# Altium PCB IRISkontroller.PcbDoc
Units mm, origin at the board's own origin, x right, y up, seen from the top; angles counter-clockwise.
Board outline 85 x 85 mm, 2 copper layers (Top Layer, Bottom Layer); 73 components, 52 nets, 271 pads, 6 vias.
Unrouted connection lines stored in the file: 181.
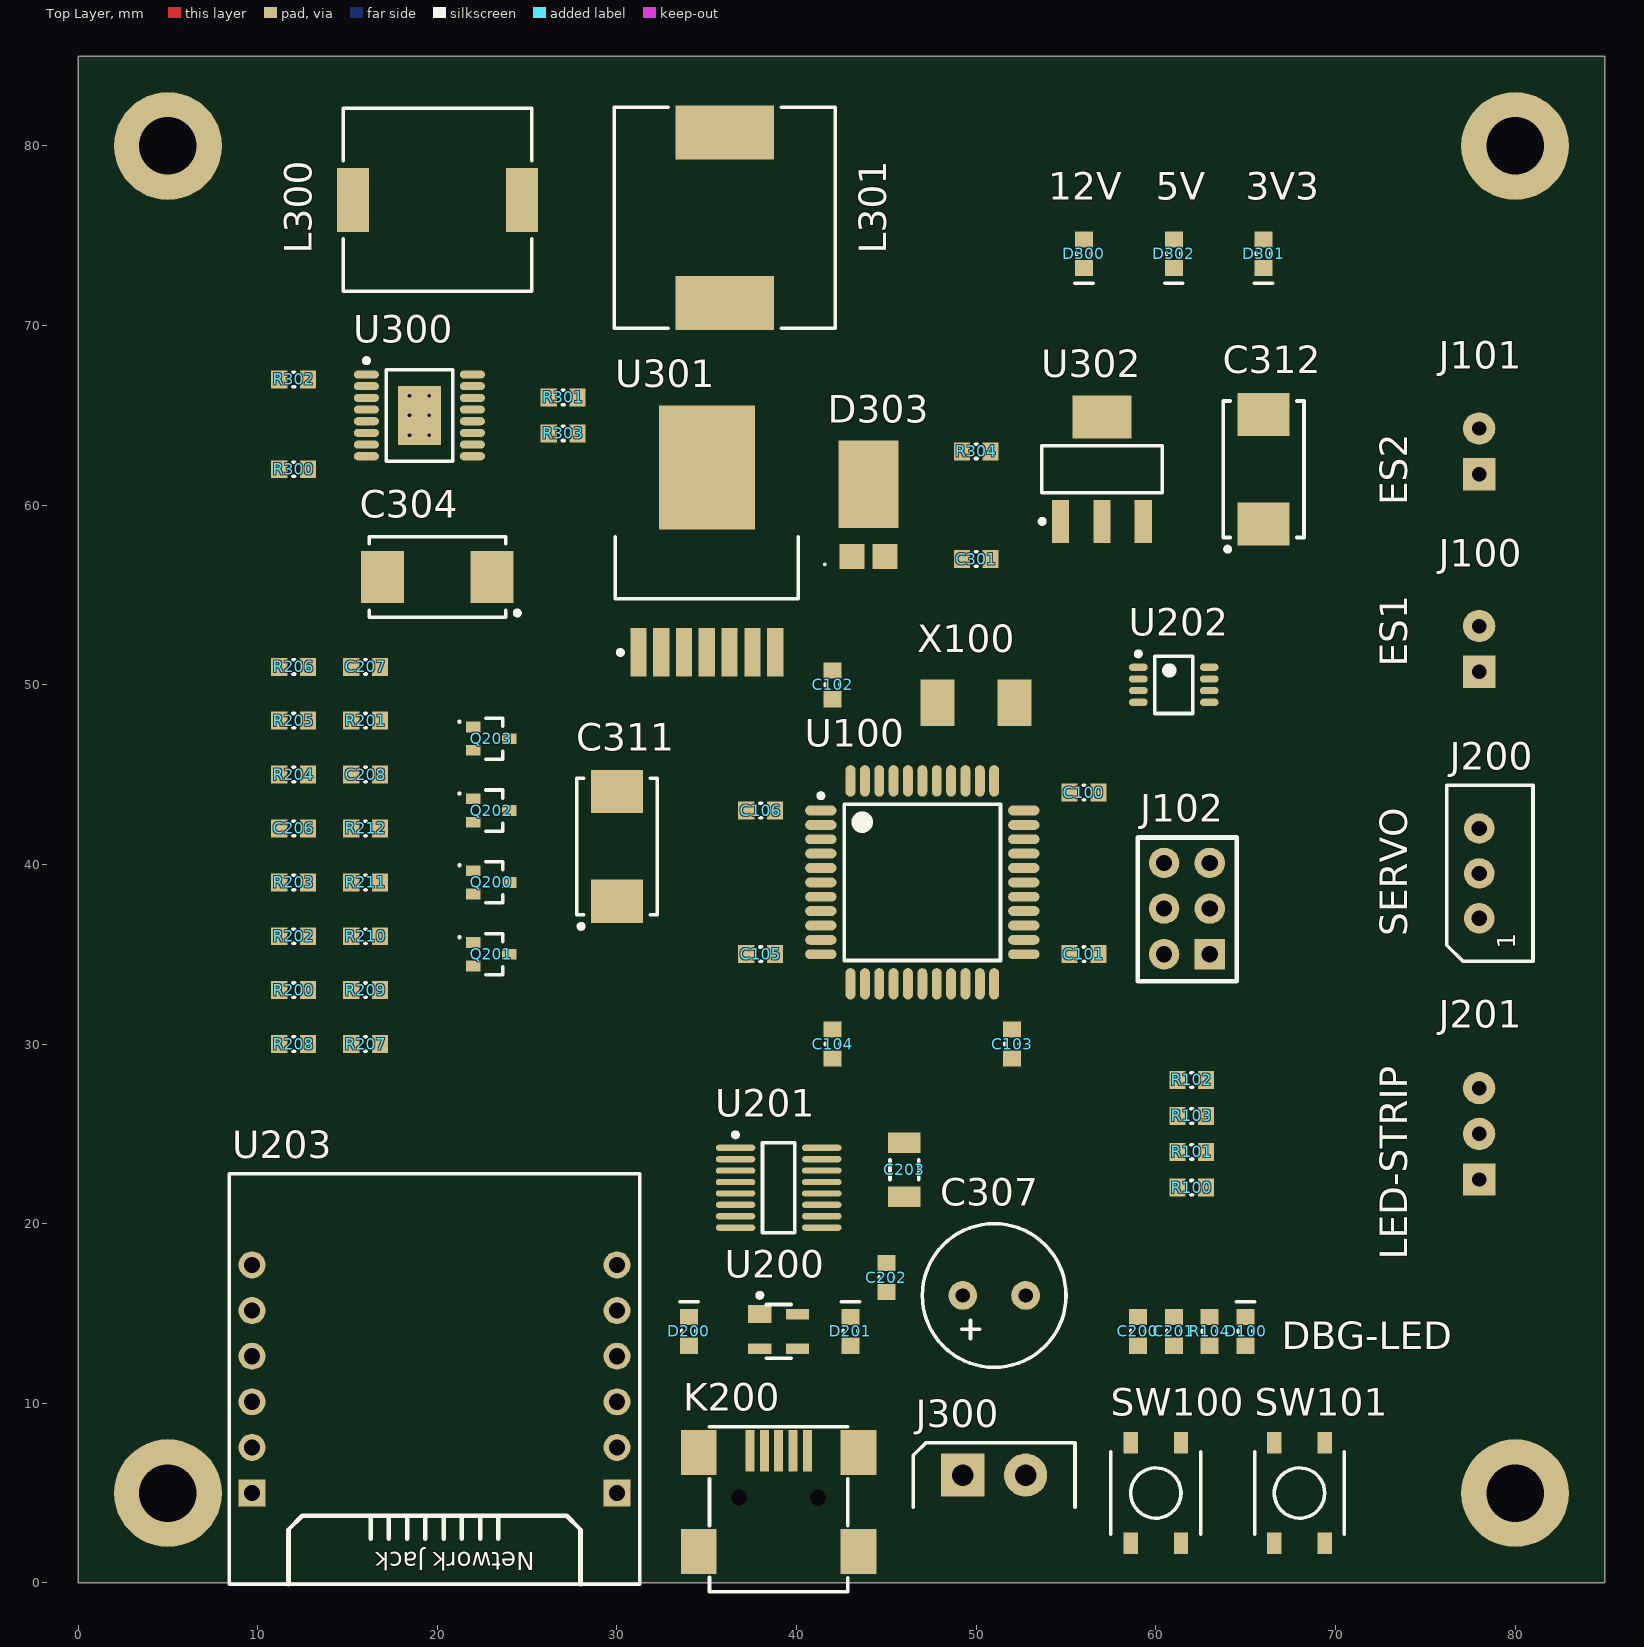
[diagram p0: Top Layer view]
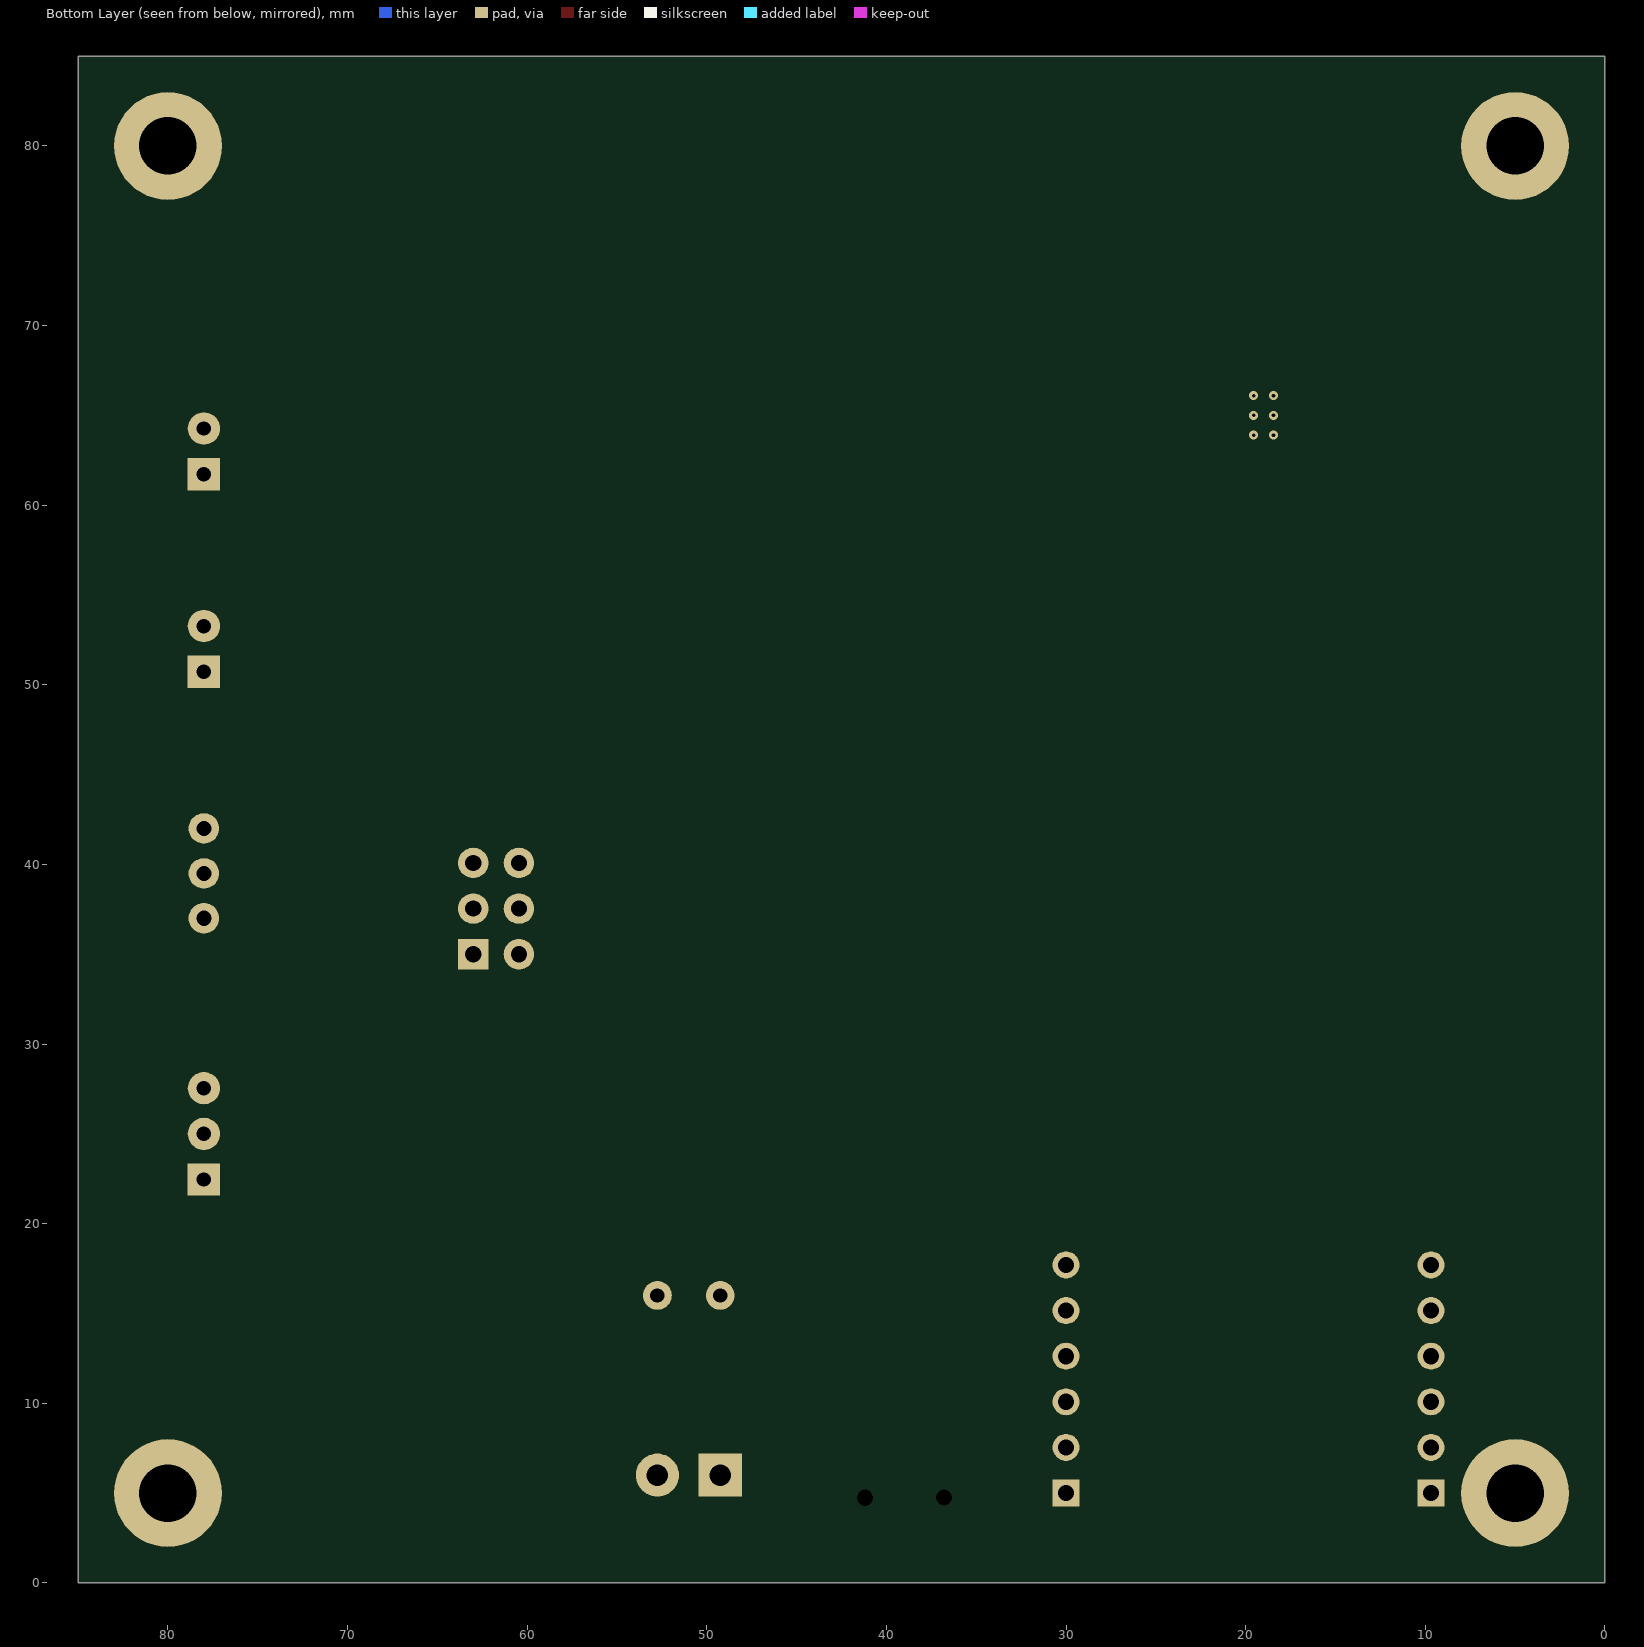
[diagram p1: Bottom Layer view, seen from below]

## Layer stack, top to bottom
Top Solder: solder mask 0.0102, Solder Resist, Dk 3.5
Top Layer: signal copper 0.0356
Dielectric 1: dielectric 0.32, FR-4, Dk 4.8
Bottom Layer: signal copper 0.0356
Bottom Solder: solder mask 0.0102, Solder Resist, Dk 3.5

## Board outline
0,0 0,85 85,85 85,0 0,0

## Design rules (kind name [scope] priority, off if disabled: settings)
Clearance [All] p1: gap=0.254
DiffPairsRouting [All] p1: maxlimit=0.254 minlimit=0.254 mostfreqgap=0.254 toplayer_minwidth=0.381 toplayer_maxwidth=0.381 toplayer_prefwidth=0.381 bottomlayer_minwidth=0.381 bottomlayer_maxwidth=0.381 bottomlayer_prefwidth=0.381 maxuncoupledlength=12.7
PolygonConnect [All] p1: connectstyle=Relief reliefconductorwidth=0.254 reliefentries=4 polygonreliefangle="90 Angle" airgapwidth=0.254
RoutingVias [All] p1: holewidth=0.711 width=1.27 viastyle="Through Hole" minholewidth=0.711 minwidth=1.27 maxholewidth=0.711 maxwidth=1.27
SolderMaskExpansion [All] p1: expansion=0.102
Width [All] p1: maxlimit=0.254 minlimit=0.254 preferedwidth=0.254
29 further rules are at their usual default settings.

## Classes and differential pairs
component class Powersupply: C300 C301 C302 C303 C304 C305 C306 C307 C308 C309 C310 C311 C312 D300 D301 D302 D303 J300 L300 L301 R300 R301 R302 R303 R304 U300 U301 U302
component class MCU: C100 C101 C102 C103 C104 C105 C106 D100 J100 J101 J102 L100 R100 R101 R102 R103 R104 SW100 SW101 U100 X100
component class Communication: C200 C201 C202 C203 C204 C205 C206 C207 C208 D200 D201 J200 J201 K200 L200 Q200 Q201 Q202 Q203 R200 R201 R202 R203 R204 R205 R206 R207 R208 R209 R210 R211 R212 U200 U201 U202 U203
differential pair USBD: +USBD_P -USBD_N
differential pair "": +_P -_N

## Components (designator, comment, footprint, x,y, rotation, side; value= is the part's Value field where it differs from the comment)
C100 "100nF(0603)" CAPC0603(1608)55_N 56,44 r180 top
C101 "100nF(0603)" CAPC0603(1608)55_N 56,35 r180 top
C102 "100nF(0603)" CAPC0603(1608)55_N 42,50 r90 top
C103 "100nF(0603)" CAPC0603(1608)55_N 52,30 r90 top
C104 "8.2pF(0603)" CAPC0603(1608)55_N 42,30 r270 top
C105 "8.2pF(0603)" CAPC0603(1608)55_N 38,35 r180 top
C106 "100nF(0603)" CAPC0603(1608)55_N 38,43 r180 top
C200 "100nF(0603)" CAPC0603(1608)55_N 59,14 r90 top
C201 "100nF(0603)" CAPC0603(1608)55_N 61,14 r90 top
C202 "10nF(0603)" CAPC0603(1608)55_N 45,17 r90 top
C203 "4.7uF(1206)" CAPC1206(3216)170_N 46,23 r90 top
C206 "100nF(0603)" CAPC0603(1608)55_N 12,42 r180 top
C207 "100nF(0603)" CAPC0603(1608)55_N 16,51 r180 top
C208 "100nF(0603)" CAPC0603(1608)55_N 16,45 r180 top
C301 "91pF(0603)" CAPC0603(1608)55_N 50,57 r180 top
C304 "T495D476M025ATE120" CAPMP7342X30N 20,56 r180 top
C307 "100uF(8mm)" CAPPR35D08H11 51,16 r180 top
C311 "10TPB220ML" CAPMP7342X30N 30,41 r90 top
C312 "10TPB33M" CAPMP7342X30N 66,62 r90 top
D100 "LED" I_LEDC0603(1608)_N 65,14 r90 top
D200 "LED" I_LEDC0603(1608)_N 34,14 r90 top
D201 "LED" I_LEDC0603(1608)_N 43,14 r90 top
D300 "LED" I_LEDC0603(1608)_N 56,74 r270 top
D301 "LED" I_LEDC0603(1608)_N 66,74 r270 top
D302 "LED" I_LEDC0603(1608)_N 61,74 r270 top
D303 "PDS760-13" DFN540P650X115-3N 44,60 r90 top
J100 "2PConnector" JST_2P 78,52 r0 top
J101 "2PConnector" JST_2P 78,63 r0 top
J102 "PDI Header" HEADER_3x2 63,35 r90 top
J200 "AX/MX-TTL-CONNECTOR" MOLEX_22-03-5035 78,37 r90 top
J201 "3PConnector" JST_3P 78,25 r0 top
J300 "Pluggbar skrukobling x2" FCI-20020110-C021A01LF 51,6 r270 top
K200 "USB-OTG" MILL-MAX_897-43-005-00-100001 39,4 r90 top
L300 "MSS1038-333MLC" INDP102100X40N 20,77 r0 top
L301 "MSS1210-153MEB" INDP123123X100N 36,76 r270 top
Q200 "MOSFET_N_GSD" SOT323P130X100-3_N 23,39 r90 top
Q201 "MOSFET_N_GSD" SOT323P130X100-3_N 23,35 r90 top
Q202 "MOSFET_N_GSD" SOT323P130X100-3_N 23,43 r90 top
Q203 "MOSFET_N_GSD" SOT323P130X100-3_N 23,47 r90 top
R100 "150R(0603)" RESC0603(1608)_N 62,22 r180 top
R101 "10k(0603)" RESC0603(1608)_N 62,24 r180 top
R102 "10k(0603)" RESC0603(1608)_N 62,28 r180 top
R103 "10k(0603)" RESC0603(1608)_N 62,26 r180 top
R104 "10k(0603)" RESC0603(1608)_N 63,14 r90 top
R200 "27R(0603)" RESC0603(1608)_N 12,33 r180 top
R201 "150R(0603)" RESC0603(1608)_N 16,48 r180 top
R202 "27R(0603)" RESC0603(1608)_N 12,36 r180 top
R203 "150R(0603)" RESC0603(1608)_N 12,39 r180 top
R204 "10k(0603)" RESC0603(1608)_N 12,45 r180 top
R205 "10k(0603)" RESC0603(1608)_N 12,48 r180 top
R206 "10k(0603)" RESC0603(1608)_N 12,51 r180 top
R207 "10k(0603)" RESC0603(1608)_N 16,30 r180 top
R208 "10k(0603)" RESC0603(1608)_N 12,30 r180 top
R209 "10k(0603)" RESC0603(1608)_N 16,33 r180 top
R210 "10k(0603)" RESC0603(1608)_N 16,36 r180 top
R211 "10k(0603)" RESC0603(1608)_N 16,39 r180 top
R212 "10k(0603)" RESC0603(1608)_N 16,42 r180 top
R300 "1M(0603)" RESC0603(1608)_N 12,62 r180 top
R301 "91k(0603)" RESC0603(1608)_N 27,66 r180 top
R302 "1k(0603)" RESC0603(1608)_N 12,67 r180 top
R303 "330R(0603)" RESC0603(1608)_N 27,64 r180 top
R304 "150R(0603)" RESC0603(1608)_N 50,63 r180 top
SW100 "Pushbutton SMD" SOIC254P500X160-4 60,5 r0 top
SW101 "Pushbutton SMD" SOIC254P500X160-4 68,5 r0 top
U100 "ATxmega64A4U-AU" 44A_N 47,39 r0 top
U200 "TVS PRTR5V0U2X" SOT143B-M 39,14 r0 top
U201 "FT230X" SOP0635P4800-16N 39,22 r0 top
U202 "SN74LVC2G241" TSOP65P400X130-8N 61,50 r0 top
U203 "WIZ820io" Wiz820io 30,5 r180 top
U300 "LM3602PWPT" HTSSOP65P640X120_HS-17N 19,65 r0 top
U301 "LM2677SX-5.0" DPAK127P1336X457-8N 35,58 r90 top
U302 "TLV1117" SOT230P700X180-4N 57,62 r90 top
X100 "NX5032GA-16" CRYSTAL-ABM7 50,49 r0 top

## Footprints (in the part's own frame and the unit in brackets; to place one, negate y for a bottom-side part, rotate by r counter-clockwise, add the part's x,y. Pads: shape width x height; smd on the part's side, far side on the other; paste and mask are expansions set on the pad)
44A_N [mm] "Thin QFP, 44-Leads, Body 10x10mm, Pitch 0.8mm, IPC Medium Density"
  oval 1.75x0.55 smd: 1(-5.65,4) 2(-5.65,3.2) 3(-5.65,2.4) 4(-5.65,1.6) 5(-5.65,0.8) 6(-5.65,0) 7(-5.65,-0.8) 8(-5.65,-1.6) 9(-5.65,-2.4) 10(-5.65,-3.2) 11(-5.65,-4) 23(5.65,-4) 24(5.65,-3.2) 25(5.65,-2.4) 26(5.65,-1.6) 27(5.65,-0.8) 28(5.65,0) 29(5.65,0.8) 30(5.65,1.6) 31(5.65,2.4) 32(5.65,3.2) 33(5.65,4)
  oval 0.55x1.75 smd: 12(-4,-5.65) 13(-3.2,-5.65) 14(-2.4,-5.65) 15(-1.6,-5.65) 16(-0.8,-5.65) 17(0,-5.65) 18(0.8,-5.65) 19(1.6,-5.65) 20(2.4,-5.65) 21(3.2,-5.65) 22(4,-5.65) 34(4,5.65) 35(3.2,5.65) 36(2.4,5.65) 37(1.6,5.65) 38(0.8,5.65) 39(0,5.65) 40(-0.8,5.65) 41(-1.6,5.65) 42(-2.4,5.65) 43(-3.2,5.65) 44(-4,5.65)
  silkscreen extent -5.77,-4.35 4.35,4.95, body extent -5,-5 5,5, height 1.2
CAPC0603(1608)55_N [mm] "Chip Capacitor, Body 1.6x0.8mm, Height 0.55mm, IPC Medium Density"
  rect 0.9x1 smd: 1(-0.8,0) 2(0.8,0)
  silkscreen extent -0.05,-0.4 0.05,0.4, body extent -0.87,-0.48 0.88,0.47, height 0.55
CAPC1206(3216)170_N [mm] "Chip Capacitor, Body 3.2x1.6mm, Height 1.7mm, IPC Medium Density"
  rect 1.15x1.8 smd: 1(-1.5,0) 2(1.5,0)
  silkscreen extent -0.55,-0.8 0.55,0.8, body extent -1.7,-0.9 1.7,0.9, height 1.7
CAPMP7342X30N [mm] "Molded Capacitor, 2-Leads, Body 7,30x4,25mm, IPC Medium Density"
  rect 2.4x2.9 smd: 1(-3.05,0) 2(3.05,0)
  silkscreen extent -4.57,-2.25 3.8,2.25, body extent -3.8,-2.2 3.8,2.2, height 3
CAPPR35D08H11 [mm] "D=8mm, Pitch=3.5mm, H=11mm"
  round 1.6 hole 0.8: 1(-1.75,0) 2(1.75,0)
  silkscreen extent -4,-4 4,4, body extent -4,-4 4,4, height 11.1
CRYSTAL-ABM7 [mm]
  rect 1.9x2.6 smd: 1(-2.159,0) 2(2.141,0)
  body extent -3.05,-1.75 3.05,1.75, height 1.44
DFN540P650X115-3N [mm] "DFN, 3-Leads, Body 3,97x6,50mm, Pitch 5,40mm, IPC Medium Density"
  rect 1.4x1.4 smd: 1(-2.86,0.92) 2(-2.86,-0.92)
  rect 4.86x3.36 smd: 3(1.16,0)
  silkscreen extent -3.35,2.38 -3.25,2.47, body extent -3.3,-2.02 3.3,2.02, height 1.15
DPAK127P1336X457-8N [mm] "TO, 8-Pads, Body 7,42x8,44mm (max), IPC Medium Density"
  rect 2.7x0.9 smd: 1(-6.2,3.81) 2(-6.2,2.54) 3(-6.2,1.27) 4(-6.2,0) 5(-6.2,-1.27) 6(-6.2,-2.54) 7(-6.2,-3.81)
  rect 6.9x5.35 smd: 8(4.1,0)
  silkscreen extent -6.32,-5.1 0.25,5.1, body extent -3.2,-5.07 5.44,5.07, height 4.57
FCI-20020110-C021A01LF [mm] "Pluggbar skruplint 3,5mm pitch"
  rect 2.4x2.4 hole 1.2 unplated: 1(0,-1.75)
  round 2.4 hole 1.2 unplated: 2(0,1.75)
  silkscreen extent -1.8,-4.5 1.8,4.5, body extent -1.2,-4.2 8,4.2, height 7.3
HEADER_3x2 [mm]
  rect 1.7x1.7 hole 0.9: 1(0,0)
  round 1.7 hole 0.9: 2(0,2.54) 3(2.54,0) 4(2.54,2.54) 5(5.08,0) 6(5.08,2.54)
  silkscreen extent -1.5,-1.5 6.5,4, body extent -1.27,-1.27 6.35,3.81, height 8.45
HTSSOP65P640X120_HS-17N [mm] "TSOP, 16-Leads, Body 5,00x4,40mm, Pitch 0,65mm, Thermal Pad 3,29x2,41mm, IPC Medium Density"
  oval 1.4x0.45 smd: 1(-2.95,2.275) 2(-2.95,1.625) 3(-2.95,0.975) 4(-2.95,0.325) 5(-2.95,-0.325) 6(-2.95,-0.975) 7(-2.95,-1.625) 8(-2.95,-2.275) 9(2.95,-2.275) 10(2.95,-1.625) 11(2.95,-0.975) 12(2.95,-0.325) 13(2.95,0.325) 14(2.95,0.975) 15(2.95,1.625) 16(2.95,2.275)
  rect 2.41x3.29 smd: 17(0,0)
  silkscreen extent -3.07,-2.55 1.85,3.17, body extent -2.25,-2.55 2.25,2.55, height 1.2
I_LEDC0603(1608)_N [mm] "Chip Resistor, Body 1.6x0.8mm, IPC Medium Density"
  rect 0.9x1 smd: 1(-0.8,0) 2(0.8,0)
  silkscreen extent -0.05,-0.51 1.65,0.51, body extent -0.85,-0.45 0.85,0.45, height 0.9
INDP102100X40N [mm] "Precision Wire Wound Inductor, 2-Leads, Body 10,20x10,00mm, IPC Medium Density"
  rect 1.78x3.56 smd: 1(-4.7,0) 2(4.7,0)
  silkscreen extent -5.25,-5.1 5.25,5.1, body extent -5.11,-5 5.1,5, height 3.9
INDP123123X100N [mm] "Precision Wire Wound Inductor, 2-Leads, Body 12,30x12,30mm, IPC Medium Density"
  rect 3x5.5 smd: 1(-4.75,0) 2(4.75,0)
  silkscreen extent -6.15,-6.15 6.15,6.15, body extent -6.28,-6.15 6.02,6.15, height 10.26
JST_2P [mm]
  rect 1.8x1.8 hole 0.8: 1(0,-1.27)
  round 1.8 hole 0.8: 2(0,1.27)
  body extent -2.4,-3.7 3.35,3.7, height 7
JST_3P [mm]
  rect 1.8x1.8 hole 0.8: 1(0,-2.54)
  round 1.8 hole 0.8: 2(0,0) 3(0,2.54)
  body extent -2.35,-4.95 3.4,4.95, height 7
MILL-MAX_897-43-005-00-100001 [mm] "USB-MINI-B  SMD Connector"
  rect 2.5x2 smd: 0(-2.25,4.45) 0(-2.25,-4.45) 0(3.25,4.45) 0(3.25,-4.45)
  rect 2.3x0.5 smd: 1(3.35,1.6) 2(3.35,0.8) 3(3.35,0) 4(3.35,-0.8) 5(3.35,-1.6)
  round 0.35 hole 0.9 unplated: G(0.74,-2.2) G(0.75,2.2)
  silkscreen extent -4.5,-3.85 4.7,3.85, body extent -5.15,-5.35 4.05,5.35, height 4.45
MOLEX_22-03-5035 [mm] "2.50mm Pitch, Wire-to-Board Header, Vertical, Shrouded, 3 Circuits, Tin (Sn) Plating"
  round 1.7 hole 0.85: 1(0,0) 2(2.5,0) 3(5,0)
  silkscreen extent -2.4,-3 7.4,1.8, body extent -2.45,-3.07 7.45,1.83, height 5.85
RESC0603(1608)_N [mm] "Chip Resistor, Body 1.6x0.8mm, IPC Medium Density"
  rect 0.9x1 smd: 1(-0.8,0) 2(0.8,0)
  silkscreen extent -0.05,-0.4 0.05,0.4, body extent -0.85,-0.47 0.85,0.47, height 0.6
SOIC254P500X160-4 [mm] "SMD tactile switch"
  rect 0.8x1.2 smd: 1(-1.4,2.794) 2(-1.4,-2.794) 3(1.4,2.794) 4(1.4,-2.794)
  silkscreen extent -2.5,-2.3 2.5,2.3
SOP0635P4800-16N [mm] "FT230X-SSOP-16 Medium density"
  oval 2.2x0.35 smd: 1(-2.4,2.222) 2(-2.4,1.587) 3(-2.4,0.953) 4(-2.4,0.318) 5(-2.4,-0.318) 6(-2.4,-0.953) 7(-2.4,-1.587) 8(-2.4,-2.222) 9(2.4,-2.222) 10(2.4,-1.587) 11(2.4,-0.953) 12(2.4,-0.318) 13(2.4,0.318) 14(2.4,0.953) 15(2.4,1.587) 16(2.4,2.222)
  silkscreen extent -2.52,-2.5 0.9,3.07, body extent -1.99,-2.5 1.99,2.5, height 1.75
SOT143B-M [mm] "SOT143, 4-Leads, Body 3,0x2,6mm (max), Pitch 1,92mm, IPC Medium Density"
  rect 1.3x1 smd: 1(-1.05,0.96)
  rect 1.3x0.6 smd: 2(-1.05,-0.96) 3(1.05,-0.96) 4(1.05,0.96)
  silkscreen extent -1.17,-1.5 0.7,2.13, body extent -0.7,-1.52 0.7,1.52, height 1.2
SOT230P700X180-4N [mm] "SOT223, 4-Leads, Body 6,7x7,3mm (max), Pitch 2,30mm, IPC Medium Density"
  rect 2.4x0.95 smd: 1(-2.9,2.3) 2(-2.9,0) 3(-2.9,-2.3)
  rect 2.4x3.3 smd: 4(2.9,0)
  silkscreen extent -3.02,-3.35 1.3,3.45, body extent -3.1,-3.31 3.83,3.19, height 1.59
SOT323P130X100-3_N [mm] "SOT323, 3-Leads, Body 2x2mm, Pitch 0.65mm"
  rect 0.6x0.8 smd paste-0.05: 1(0.65,1) 2(-0.65,1) 3(0,-1)
  silkscreen extent -1.14,-0.65 1.14,1.79, body extent -1.1,-1.12 1.1,1.12, height 1.1
TSOP65P400X130-8N [mm] "TSOP, 8-Leads, Body 2,95x2,80mm, Pitch 0,65mm, IPC Medium Density"
  oval 1.05x0.4 smd: 1(-1.975,0.975) 2(-1.975,0.325) 3(-1.975,-0.325) 4(-1.975,-0.975) 5(1.975,-0.975) 6(1.975,-0.325) 7(1.975,0.325) 8(1.975,0.975)
  silkscreen extent -2.1,-1.6 1.05,1.85, body extent -1.45,-1.6 1.45,1.6, height 1.3
Wiz820io [mm] "Wiz820io"
  rect 1.5x1.5 hole 0.9: 1(0,0) 12(20.32,0)
  round 1.5 hole 0.9: 2(0,-2.54) 3(0,-5.08) 4(0,-7.62) 5(0,-10.16) 6(0,-12.7) 7(20.32,-12.7) 8(20.32,-10.16) 9(20.32,-7.62) 10(20.32,-5.08) 11(20.32,-2.54)
  silkscreen extent -1.27,-17.78 21.59,5.08

## Part data
C100 C101 C102 C103 C106 C200 C201 C206 C207 C208: "100nF 0603 5% X7R 50V"
C104 C105 C202: "0603 5% NP0 50V"
C203: "1206 chip X7R 50V"
C301: "100nF 0603 5% NP0 50V"
C307: "D=8mm Radial, 20% 50V 3,5mm pitch"
D100 D200 D201 D300 D301 D302: library part "SMD LED Red", "SMD"
D303: "SCHOTTKY RECTIFIER POWERDI5"
J100 J101: library part "JST 2pin", "pris pr. stk."
J102: library part PDI-HEADER, "PDI Xmega programming header"
J200: "Dynamixel AX/MX-Series servo connector 3 pin TTL version"
J201: library part "JST 3pin", "pris pr. stk."
J300: "Skruplint"
K200: library part MILL-MAX_897-43-005-00-100001, "MINI USB B DEVICE CONNECTOR MOLEX 51387-0571"
L300: "INDUCTOR, PWR, 33UH, 2.3A, 20%,13MHZ"
L301: "INDUCTOR, PWR, 15UH, 8.7A, 20%,12MHZ"
Q200 Q201 Q202 Q203: library part 2N7002, "N-Channel MOSFET 300mA"
R100 R201 R203 R304: library part 3031, "0603 0.1W 1% Thick film resistor"
R101 R102 R103 R104 R204 R205 R206 R207 R208 R209 R210 R211 R212: library part 2444, "10k 0603 0.1W 1% Thick film resistor"
R200 R202: library part 3033, "0603 0.1W 1% Thick film resistor"
R300: library part 3025, "0603 0.1W 1% Thick film resistor"
R301: library part 2997, "91k 0603 0.1W 1% Thick film resistor"
R302: library part 3029, "0603 0.1W 1% Thick film resistor"
R303: library part 2448, "330R 0603 0.1W 1% Thick film resistor"
SW100 SW101: "Momentary tactile pushbutton SMD"
U100: "8/16-bit AVR XMEGA A4U Microcontroller, 1.6-3.6V, 64KB + 4KB Flash"
U200: library part PRTR5V0U2X, "TVS Didode dual PRTR5V0U2X"
U201: "IC USB SERIAL BASIC UART 16SSOP"
U202: "Dual  Buffer/Driver  With  3-State  Outputs, designed for 1.65-5.5Vcc operation"
U203: "WIZ820io, Ethernet module with W5200 module onboard and MAG-JACK"
U302: "Low dropout regulator"
X100: "Crystal 16 MHz"

## Free pads (board coordinates)
  round 6 hole 3.2: 0(5,5) 0(5,80) 0(80,5) 0(80,80)

## Via types
v1: diameter 0.5, hole 0.2, Top Layer to Bottom Layer, 6 vias

## Nets (pads, with @x,y where several pads share a name; then routed paths per layer and width w, separated by ;. In a path a pad name is that pad's centre, name@x,y a point inside that pad or via, vN(x,y) a via of type N, cw(c..) or ccw(c..) an arc to the next point about the centre after c; other vN are vias at no path point)
_N: R200.2 U201.9
_P: R202.2 U201.8
AVCC_P3V3: C106.2 U100.39
DEBUG_BTN: R101.1 SW100.1 SW100.2 U100.40
DEBUG_LED: R100.1 U100.10
END_STOP_1: J100.1 R102.1 U100.41
END_STOP_2: J101.1 R103.1 U100.42
GND: C100.2 C101.2 C102.2 C103.1 C104.1 C105.1 C106.1 C200.1 C201.1 C202.1 C203.1 C206.1 C207.1 C208.1 C304.1 C307.1 C311.1 C312.1 D303.1 D303.2 J100.2 J101.2 J102.6 J200.1 J201.3 J300.2 K200.5 R301.1 R302.1 R303.1 R304.1 SW100.3 SW100.4 SW101.3 SW101.4 U100.8 U100.18 U100.30 U100.38 U200.1 U201.5 U201.13 U202.4 U203.1 U203.2 U203.12 U300.6 U300.10 U300.15 U300.16 U300.17 U301.4 U302.1
  other v1: 18.45,63.9 19.55,63.9 18.45,65 19.55,65 18.45,66.1 19.55,66.1
LED_DATA: Q203.2 R211.2 U100.15 U100.17
LED_DATA_5V: J201.2 Q203.3 R212.2
NetC104_2: C104.2 U100.37 X100.1
NetC105_2: C105.2 U100.36 X100.2
NetC202_2: C202.2 K200.1 U200.4
NetC300_1: U300.3
NetC300_2: L300.1 U300.1 U300.2
NetC301_1: C301.1 R300.1 R301.2 U300.9
NetC305_2: U300.4
NetC309_1: U301.3
NetC309_2: D303.3 L301.1 U301.1
NetD100_2: D100.2 R100.2
NetD200_2: D200.2 R201.1
NetD201_2: D201.2 R203.1
NetD300_2: D300.2 R302.2
NetD301_2: D301.2 R303.2
NetD302_2: D302.2 R304.2
NetR201_2: R201.2 U201.14
NetR203_2: R203.2 U201.7
PDI_CLK/RESET: C103.2 J102.5 R104.1 SW101.1 SW101.2 U100.35 U203.8
PDI_DATA: J102.1 U100.34
SERVO_DATA: J200.3 R204.1 U202.2 U202.3
SERVO_DIR: Q202.2 R209.2 U100.11 U202.1
SERVO_DIR_5V: Q202.3 R210.2 U202.7
SERVO_RX: Q201.2 R207.2 U100.12
SERVO_RX_5V: Q201.3 R208.2 U202.6
SERVO_TX: Q200.2 R205.2 U100.13
SERVO_TX_5V: Q200.3 R206.2 U202.5
USB_P3V3: C200.2 D200.1 D201.1 U201.3 U201.10 U201.11
USB_P5V0: C201.2 C203.2 U201.12
USB_RX: U100.22 U201.1
USB_TX: U100.23 U201.4
USBD_N: K200.2 R200.1 U200.3
USBD_P: K200.3 R202.1 U200.2
VCC_P3V3: C100.1 C101.1 C102.1 C207.2 C208.2 C312.2 D100.1 D302.1 J102.2 J200.2 Q200.1 Q201.1 Q202.1 Q203.1 R101.2 R102.2 R103.2 R104.2 R205.1 R207.1 R209.1 R211.1 U100.9 U100.19 U100.31 U203.10 U203.11 U302.2 U302.4
VCC_P5V0: C206.2 C311.2 D301.1 J201.1 L301.2 R204.2 R206.1 R208.1 R210.1 R212.1 U202.8 U301.6 U302.3
VCC_P12V0: C301.2 C304.2 D300.1 L300.2 R300.2 U300.5
VCC_P22V-36V: C307.2 J300.1 U300.12 U300.13 U300.14 U301.2
WIZ_INT: U100.20 U203.6
WIZ_MISO: U100.26 U203.7
WIZ_MOSI: U100.25 U203.3
WIZ_PWDWN: U100.21 U203.9
WIZ_SCLK: U100.27 U203.4
WIZ_SS: U100.24 U203.5
pads on no net: J102.3 J102.4 K200.0 K200.4 K200.G U100.1 U100.2 U100.3 U100.4 U100.5 U100.6 U100.7 U100.14 U100.16 U100.28 U100.29 U100.32 U100.33 U100.43 U100.44 U201.2 U201.6 U201.15 U201.16 U300.7 U300.8 U300.11 U301.5 U301.7 U301.8

## Silkscreen, mask and mechanical layers (free items; w line width, h text height)
Top Overlay:
  text "12V" at 54,77 h1.52
  text "5V" at 60,77 h1.52
  text "3V3" at 65,77 h1.52
  text "ES2" at 74,60 h1.52 r90
  text "ES1" at 74,51 h1.52 r90
  text "SERVO" at 74,36 h1.52 r90
  text "LED-STRIP" at 74,18 h1.52 r90
  text "DBG-LED" at 67,13 h1.52

## Text inside footprints (layer, text, board x,y; h text height)
J200: Top Overlay "1" at 80,35.3 h1 r90
K200: Mechanical 15 "PCB EDGE" at 41.277,0.6 h1 r180
U203: Top Overlay "Network Jack" at 25.428,1.698 h1 r180